# EAGLE board panel_2x1 (EAGLE 7.7.0)
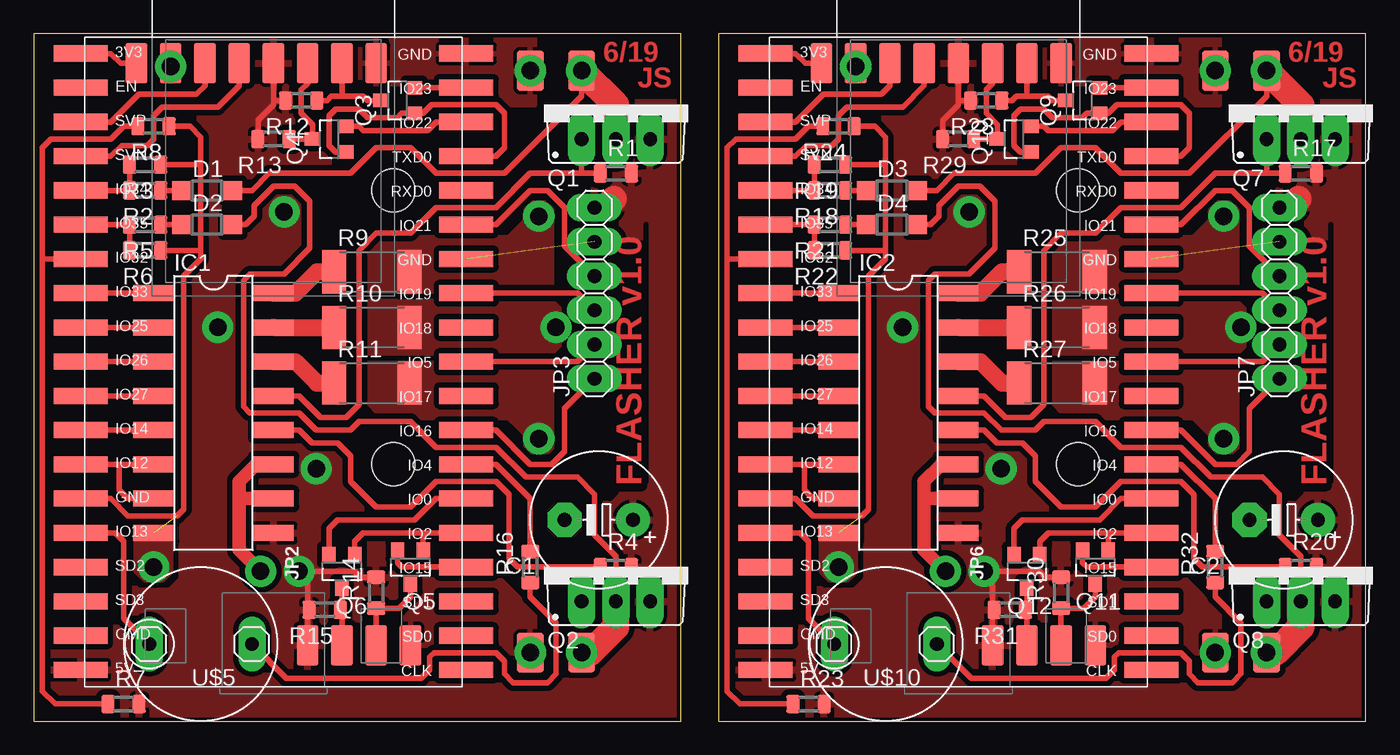
[diagram p0: board, top side]
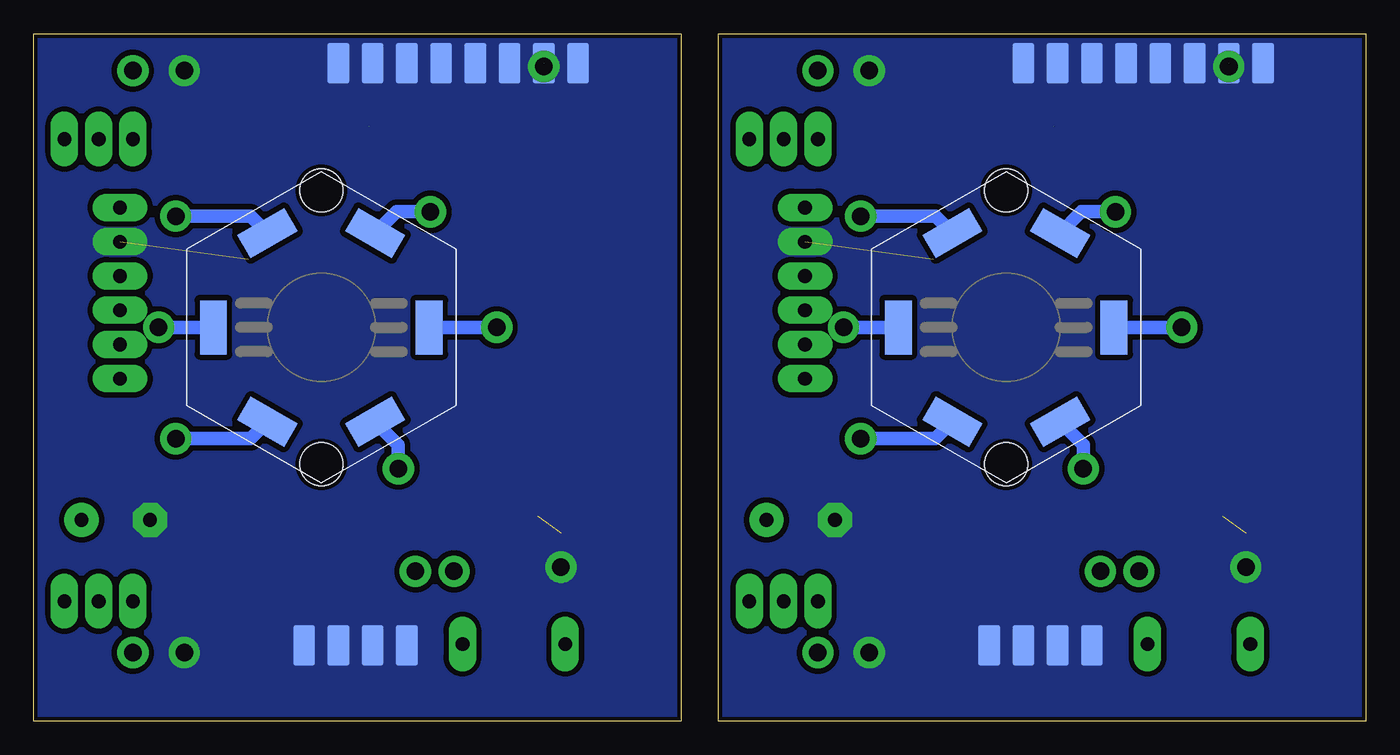
[diagram p1: board, bottom side, seen from below]

Size 98.8 x 51 mm. Coordinates in mm from the lower left corner, seen from the top.
Outline: 0,0 48,0 48,51 0,51 0,0
Outline: 50.8,0 98.8,0 98.8,51 50.8,51 50.8,0
Copper layers (1*16): Top 0.035mm / dielectric 1.5mm / Bottom 0.035mm
Design rules "homemade": minimum track width 0.4mm, minimum drill 0.8mm, track to track 0.4mm, track to pad 0.4mm, pad to pad 0.4mm, via to via 0.4mm, smd to smd 0mil, copper to edge 0.3mm, drill to drill 8mil, minimum pad ring 0.4mm, minimum via ring 0.3mm, stop-mask expansion 4mil, vias tented up to drill 0mil, thermal gap 10mil
Holes 3.2 mm at 26.67,39.37 26.67,19.05 77.47,39.37 77.47,19.05
tRestrict: area 23.8,16.2 to 29.6,21.9; area 23.8,36.5 to 29.6,42.3; area 74.6,16.2 to 80.4,21.9; area 74.6,36.5 to 80.4,42.3; 6 lines

## Footprints (pad centres in the part's own frame; a part is rotated, then mirrored left to right if it is on the bottom)
E5-10,5 = drill 1.016 pad 2.54: + -2.54,0 | drill 1.016 pad 2.54 octagon: - 2.54,0
SOD123 = smd 1.4 x 1.4: A 1.9,0; C -1.9,0
DIL16_BIG_SMD = smd 1.2 x 3: 1 -8.89,-4.445; 2 -6.35,-4.445; 3 -3.81,-4.445; 4 -1.27,-4.445; 5 1.27,-4.445; 6 3.81,-4.445; 7 6.35,-4.445; 8 8.89,-4.445; 9 8.89,4.445; 10 6.35,4.445; 11 3.81,4.445; 12 1.27,4.445; 13 -1.27,4.445; 14 -3.81,4.445; 15 -6.35,4.445; 16 -8.89,4.445
DEVKITC_BIG_SMD = smd 4 x 1.2: 1 -14.3,46.99; 2 -14.3,44.45; 3 -14.3,41.91; 4 -14.3,39.37; 5 -14.3,36.83; 6 -14.3,34.29; 7 -14.3,31.75; 8 -14.3,29.21; 9 -14.3,26.67; 10 -14.3,24.13; 11 -14.3,21.59; 12 -14.3,19.05; 13 -14.3,16.51; 14 -14.3,13.97; 15 -14.3,11.43; 16 -14.3,8.89; 17 -14.3,6.35; 18 -14.3,3.81; 19 -14.3,1.27; 20 14.3,1.27; 21 14.3,3.81; 22 14.3,6.35; 23 14.3,8.89; 24 14.3,11.43; 25 14.3,13.97; 26 14.3,16.51; 27 14.3,19.05; 28 14.3,21.59; 29 14.3,24.13; 30 14.3,26.67; 31 14.3,29.21; 32 14.3,31.75; 33 14.3,34.29; 34 14.3,36.83; 35 14.3,39.37; 36 14.3,41.91; 37 14.3,44.45; 38 14.3,46.99
PINH2X04SMD = smd 1.6 x 3 bottom: B1 -3.81,-2; B2 -1.27,-2; B3 1.27,-2; B4 3.81,-2 | smd 1.6 x 3: T1 -3.81,-2; T2 -1.27,-2; T3 1.27,-2; T4 3.81,-2
1X06 = drill 1.016 long: 1 -6.35,0; 2 -3.81,0; 3 -1.27,0; 4 1.27,0; 5 3.81,0; 6 6.35,0
HEX_HEATSINK = smd 4 x 2 rotated 330: B+ 4,7; R- -4,-7 | smd 4 x 2 rotated 210: B- -4,7; R+ 4,-7 | smd 2 x 4: G+ 8,0; G- -8,0
TO220BV = drill 1.016 long: D 0,-2.54; G -2.54,-2.54; S 2.54,-2.54
SOT23_DIST = smd 1 x 1.2: 1 -0.95,-1.227; 2 0.95,-1.227; 3 0,1.227
R0805S = smd 1 x 1.35: 1 -1.15,0; 2 1.15,0
R2512 = smd 1.8 x 3.2: 1 -2.8,0; 2 2.8,0
2X3MM = smd 2 x 3: 1 0,0
PIEZO = drill 1.016 long: + 1.27,8.89; - 1.27,1.27

## Placement (x,y rotation side)
C1  [E5-10,5]  41.91,14.92 180 top
C2  [E5-10,5]  92.71,14.92 180 top
D1  [SOD123]  12.86,39.37 0 top
D2  [SOD123]  12.86,36.83 0 top
D3  [SOD123]  63.66,39.37 0 top
D4  [SOD123]  63.66,36.83 0 top
IC1  ULN2004A_BIG_SMD  [DIL16_BIG_SMD]  13.34,22.86 270 top
IC2  ULN2004A_BIG_SMD  [DIL16_BIG_SMD]  64.14,22.86 270 top
IM1  DEVKITC_BIG_SMD  [DEVKITC_BIG_SMD]  17.78,2.54 0 top
IM2  DEVKITC_BIG_SMD  [DEVKITC_BIG_SMD]  68.58,2.54 0 top
JP1  [PINH2X04SMD]  21.59,50.8 0 top
JP2  [PINH2X04SMD]  24.13,7.62 0 top
JP3  [1X06]  41.59,31.75 90 top
JP4  [PINH2X04SMD]  11.43,50.8 0 top
JP5  [PINH2X04SMD]  72.39,50.8 0 top
JP6  [PINH2X04SMD]  74.93,7.62 0 top
JP7  [1X06]  92.39,31.75 90 top
JP8  [PINH2X04SMD]  62.23,50.8 0 top
LED1  [HEX_HEATSINK]  26.67,29.21 0 bottom
LED2  [HEX_HEATSINK]  77.47,29.21 0 bottom
Q1  IRF4905  [TO220BV]  43.18,45.72 0 top
Q2  IRF4905  [TO220BV]  43.18,11.43 0 top
Q3  [SOT23_DIST]  26.99,46.04 90 top
Q4  [SOT23_DIST]  21.91,43.18 90 top
Q5  [SOT23_DIST]  27.94,11.43 180 top
Q6  [SOT23_DIST]  22.86,11.11 180 top
Q7  IRF4905  [TO220BV]  93.98,45.72 0 top
Q8  IRF4905  [TO220BV]  93.98,11.43 0 top
Q9  [SOT23_DIST]  77.79,46.04 90 top
Q10  [SOT23_DIST]  72.71,43.18 90 top
Q11  [SOT23_DIST]  78.74,11.43 180 top
Q12  [SOT23_DIST]  73.66,11.11 180 top
R1  100k  [R0805S]  43.18,40.64 0 top
R2  18k  [R0805S]  8.26,39.37 180 top
R3  33k  [R0805S]  8.26,41.27 180 top
R4  100k  [R0805S]  43.18,11.43 0 top
R5  18k  [R0805S]  8.26,36.83 180 top
R6  33k  [R0805S]  8.26,34.92 180 top
R7  4k7  [R0805S]  6.67,1.27 0 top
R8  1k  [R0805S]  8.89,44.13 180 top
R9  10R  [R2512]  25.08,33.34 0 top
R10  10R  [R2512]  25.08,29.21 0 top
R11  10R  [R2512]  25.08,25.08 0 top
R12  18k  [R0805S]  19.84,46.04 180 top
R13  18k  [R0805S]  17.78,43.18 180 top
R14  18k  [R0805S]  25.4,9.53 90 top
R15  18k  [R0805S]  21.59,8.26 180 top
R16  18k  [R0805S]  36.83,11.43 90 top
R17  100k  [R0805S]  93.98,40.64 0 top
R18  18k  [R0805S]  59.05,39.37 180 top
R19  33k  [R0805S]  59.05,41.27 180 top
R20  100k  [R0805S]  93.98,11.43 0 top
R21  18k  [R0805S]  59.05,36.83 180 top
R22  33k  [R0805S]  59.05,34.92 180 top
R23  4k7  [R0805S]  57.47,1.27 0 top
R24  1k  [R0805S]  59.69,44.13 180 top
R25  10R  [R2512]  75.88,33.34 0 top
R26  10R  [R2512]  75.88,29.21 0 top
R27  10R  [R2512]  75.88,25.08 0 top
R28  18k  [R0805S]  70.64,46.04 180 top
R29  18k  [R0805S]  68.58,43.18 180 top
R30  18k  [R0805S]  76.2,9.53 90 top
R31  18k  [R0805S]  72.39,8.26 180 top
R32  18k  [R0805S]  87.63,11.43 90 top
U$1  PAD_1SIDE_SMALL  [2X3MM]  40.64,48.26 180 top
U$2  PAD_1SIDE_SMALL  [2X3MM]  36.83,48.26 180 top
U$3  PAD_1SIDE_SMALL  [2X3MM]  40.64,5.08 180 top
U$4  PAD_1SIDE_SMALL  [2X3MM]  36.83,5.08 180 top
U$5  PIEZO  [PIEZO]  17.46,4.45 90 top
U$6  PAD_1SIDE_SMALL  [2X3MM]  91.44,48.26 180 top
U$7  PAD_1SIDE_SMALL  [2X3MM]  87.63,48.26 180 top
U$8  PAD_1SIDE_SMALL  [2X3MM]  91.44,5.08 180 top
U$9  PAD_1SIDE_SMALL  [2X3MM]  87.63,5.08 180 top
U$10  PIEZO  [PIEZO]  68.26,4.45 90 top

## Library data of the parts
C1 C2 R1-R32 = rcl_upravena
D1-D4 = diode
IC1 IC2 = uln-udn_upravena
IM1 IM2 = esp32
JP1 JP2 JP4-JP6 JP8 = pinhead_smd
JP3 JP7 = pinhead
LED1 LED2 = RGB_LED
Q1 Q2 Q7 Q8 = transistor-power
Q3-Q6 Q9-Q12 = transistors
U$1-U$4 U$6-U$9 = wirepad_smd
U$5 U$10 = piezo

## Nets
!B: IC1.16 R9.1
!B1: IC2.16 R25.1
!G: IC1.15 R10.1
!G1: IC2.15 R26.1
!PWR1_EN: IC1.13 Q1.G R1.1
!PWR1_EN1: IC2.13 Q7.G R17.1
!PWR2_EN: IC1.12 Q2.G R4.1
!PWR2_EN1: IC2.12 Q8.G R20.1
!R: IC1.14 R11.1
!R1: IC2.14 R27.1
!W: IC1.10 IC1.11
!W1: IC2.10 IC2.11
+3V1: IM2.1 JP8.T1
+3V3: IM1.1 JP4.T1
+5V: C1.+ IC1.9 IM1.19 JP1.T1 JP2.T1 JP3.6 LED1.B+ LED1.G+ LED1.R+ Q1.S Q2.S R1.2 R4.2 R7.2 R12.2 R13.2 R14.2 R15.2
+5V1: C2.+ IC2.9 IM2.19 JP5.T1 JP6.T1 JP7.6 LED2.B+ LED2.G+ LED2.R+ Q7.S Q8.S R17.2 R20.2 R23.2 R28.2 R29.2 R30.2 R31.2
B: IC1.1 IM1.8
B1: IC2.1 IM2.8
BA: LED1.B- R9.2
BA1: LED2.B- R25.2
BUZZ-N: R16.1 U$5.-
BUZZ-N1: R32.1 U$10.-
BUZZ_N: IM1.26 R16.2
BUZZ_N1: IM2.26 R32.2
BUZZ_P: IM1.15 U$5.+
BUZZ_P1: IM2.15 U$10.+
EN: IM1.2
EN1: IM2.2
G: IC1.2 IM1.9
G1: IC2.2 IM2.9
GA: LED1.G- R10.2
GA1: LED2.G- R26.2
GND: C1.- IC1.8 IM1.14 IM1.32 IM1.38 JP1.B1 JP1.B2 JP1.B3 JP1.B4 JP1.T4 JP2.B1 JP2.B2 JP2.B3 JP2.B4 JP2.T4 JP3.5 JP4.B1 JP4.B2 JP4.B3 JP4.B4 JP4.T2 R3.1 R6.1 R8.1 U$2.1 U$4.1
GND1: C2.- IC2.8 IM2.14 IM2.32 IM2.38 JP5.B1 JP5.B2 JP5.B3 JP5.B4 JP5.T4 JP6.B1 JP6.B2 JP6.B3 JP6.B4 JP6.T4 JP7.5 JP8.B1 JP8.B2 JP8.B3 JP8.B4 JP8.T2 R19.1 R22.1 R24.1 U$7.1 U$9.1
IO0: IM1.25 Q6.2
IO0_1: JP6.T2 Q12.3 R31.1
IO0_5: JP2.T2 Q6.3 R15.1
IO1: IM2.16
IO1_EN: IM1.24 Q5.1 Q6.1
IO1_EN1: IM2.24 Q11.1 Q12.1
IO2: IM2.17
IO2_EN: IM1.35 Q3.1 Q4.1
IO2_EN1: IM2.35 Q9.1 Q10.1
IO3: IM1.34
IO4: IM2.18
IO5: IM1.29 JP3.2
IO6: IM1.20
IO7: IM1.21
IO8: IM1.22
IO9: IM1.16
IO10: IM1.17
IO11: IM1.18
IO12: IM2.20
IO13: IM2.21
IO14: IM2.22
IO15: IM1.23 Q5.2
IO15_1: JP6.T3 Q11.3 R30.1
IO15_5: JP2.T3 Q5.3 R14.1
IO16: IM1.27 JP3.1
IO17: IM1.28
IO18: IM1.30
IO19: IM1.31 JP3.3
IO20: IM2.37 Q9.2
IO21: IM1.33 JP3.4
IO22: IM1.36 Q4.2
IO22_1: JP5.T2 Q10.3 R29.1
IO22_5: JP1.T2 Q4.3 R13.1
IO23: IM1.37 Q3.2
IO23_1: JP5.T3 Q9.3 R28.1
IO23_5: JP1.T3 Q3.3 R12.1
IO24: IM2.36 Q10.2
IO25: IM2.25 Q12.2
IO26: IM2.23 Q11.2
IO27: IM2.33 JP7.4
IO28: IM2.31 JP7.3
IO29: IM2.30
IO30: IM2.28
IO31: IM2.29 JP7.2
IO32: IM2.27 JP7.1
IO33: IM2.3 JP8.T3
IO34: IM2.4 JP8.T4
IO35: IM2.34
IO36: IM1.3 JP4.T3
IO39: IM1.4 JP4.T4
PWR1: D1.A Q1.D U$1.1
PWR1+: D1.C R2.1
PWR1+1: D3.C R18.1
PWR1_EN: IC1.4 IM1.11
PWR1_EN1: IC2.4 IM2.11
PWR1_MEAS: IM1.5 R2.2 R3.2
PWR1_MEAS1: IM2.5 R18.2 R19.2
PWR2: D2.A Q2.D U$3.1
PWR2+: D2.C R5.1
PWR2+1: D4.C R21.1
PWR2_EN: IC1.5 IM1.12
PWR2_EN1: IC2.5 IM2.12
PWR2_MEAS: IM1.6 R5.2 R6.2
PWR2_MEAS1: IM2.6 R21.2 R22.2
PWR3: D3.A Q7.D U$6.1
PWR4: D4.A Q8.D U$8.1
PWR_MEAS: IM1.7 R7.1 R8.2
PWR_MEAS1: IM2.7 R23.1 R24.2
R: IC1.3 IM1.10
R1: IC2.3 IM2.10
RA: LED1.R- R11.2
RA1: LED2.R- R27.2
W: IC1.6 IC1.7 IM1.13
W1: IC2.6 IC2.7 IM2.13

## Tracks (layer width: path | path; a pad name or v marks a point on that pad's centre or on a via)
!B
  Top 1.27: IC1.16 19.43,31.75 21.01,33.34 R9.1
!B1
  Top 1.27: IC2.16 70.22,31.75 71.81,33.34 R25.1
!G
  Top 1.27: IC1.15 R10.1
!G1
  Top 1.27: IC2.15 R26.1
!PWR1_EN
  Top 0.406: 40.64,40.64 36.83,40.64 34.29,38.1 29.84,38.1 27.94,36.2 25.4,36.2 24.13,34.92 24.13,23.5 23.18,22.54 21.27,22.54 19.68,24.13 IC1.13 | Q1.G 40.64,40.64 | R1.1 40.64,40.64
!PWR1_EN1
  Top 0.406: 91.44,40.64 87.63,40.64 85.09,38.1 80.64,38.1 78.74,36.2 76.2,36.2 74.93,34.92 74.93,23.5 73.98,22.54 72.07,22.54 70.48,24.13 IC2.13 | Q7.G 91.44,40.64 | R17.1 91.44,40.64
!PWR2_EN
  Top 0.406: IC1.12 19.68,21.59 20.64,20.64 22.54,20.64 23.5,19.68 23.5,17.78 25.4,15.88 27.94,15.88 29.84,17.78 34.29,17.78 35.24,16.83 35.24,12.06 35.88,11.43 40.64,11.43 | 40.64,11.43 Q2.G | R4.1 40.64,11.43
!PWR2_EN1
  Top 0.406: IC2.12 70.48,21.59 71.44,20.64 73.34,20.64 74.3,19.68 74.3,17.78 76.2,15.88 78.74,15.88 80.64,17.78 85.09,17.78 86.04,16.83 86.04,12.06 86.68,11.43 91.44,11.43 | 91.44,11.43 Q8.G | R20.1 91.44,11.43
!R
  Top 1.27: IC1.14 19.43,26.67 21.01,25.08 R11.1
!R1
  Top 1.27: IC2.14 70.22,26.67 71.81,25.08 R27.1
!W  (via drill 1.3)
  Top 1.016: IC1.11 16.51,19.05 15.24,17.78 15.24,16.51 | 15.24,16.51 15.24,12.7 v16.83,11.11 | IC1.10 15.24,16.51
!W1  (via drill 1.3)
  Top 1.016: IC2.11 67.31,19.05 66.04,17.78 66.04,16.51 | 66.04,16.51 66.04,12.7 v67.63,11.11 | IC2.10 66.04,16.51
+3V1
  Top 0.406: IM2.1 56.52,49.53 57.24,48.8 JP8.T1
+3V3
  Top 0.406: IM1.1 5.71,49.53 6.45,48.8 JP4.T1
+5V  (via drill 1.3)
  Top 0.406: JP1.T1 17.78,46.04 | 17.78,46.04 17.78,45.72 16.63,44.57 R13.2 | R12.2 17.78,46.04 | R14.2 24.25,10.68 23.81,11.11 20.64,11.11 20.32,10.79 20.32,8.26 | 20.32,8.26 JP2.T1 | R15.2 20.32,8.26
  Top 1.93: JP3.6 42.39,38.1 43.02,38.73
  Bottom 1.016: LED1.R+ 20.95,20.5 v20.95,18.73 | LED1.G+ v13.65,29.21 | LED1.B+ 21.1,37.78 v18.57,37.78
  other vias: 19.68,11.11
  pour Top (rank 3): 0,50.8 0,0 48.1,0 48.1,50.8
+5V1  (via drill 1.3)
  Top 0.406: JP5.T1 68.58,46.04 | 68.58,46.04 68.58,45.72 67.43,44.57 R29.2 | R28.2 68.58,46.04 | R30.2 75.05,10.68 74.61,11.11 71.44,11.11 71.12,10.79 71.12,8.26 | 71.12,8.26 JP6.T1 | R31.2 71.12,8.26
  Top 1.93: JP7.6 93.19,38.1 93.82,38.73
  Bottom 1.016: LED2.R+ 71.75,20.5 v71.75,18.73 | LED2.G+ v64.45,29.21 | LED2.B+ 71.9,37.78 v69.37,37.78
  other vias: 70.48,11.11
  pour Top (rank 3): 50.8,50.8 50.8,0 98.9,0 98.9,50.8
B
  Top 0.406: IM1.8 IC1.1
B1
  Top 0.406: IM2.8 IC2.1
BA  (via drill 1.3)
  Bottom 1.016: LED1.B- 31.93,37.47 v37.47,37.47
  pour Top (rank 2, no thermals): 24.61,31.75 38.42,31.75 38.42,38.1 38.1,38.42 36.83,38.42 36.51,38.1 36.51,37.15 35.24,35.88 25.88,35.88 24.61,34.61
BA1  (via drill 1.3)
  Bottom 1.016: LED2.B- 82.72,37.47 v88.27,37.47
  pour Top (rank 2, no thermals): 75.41,31.75 89.22,31.75 89.22,38.1 88.9,38.42 87.63,38.42 87.31,38.1 87.31,37.15 86.04,35.88 76.68,35.88 75.41,34.61
BUZZ-N
  Top 0.406: U$5.- 18.73,3.17 28.73,3.17 29.37,3.81 29.37,4.76 29.69,5.08 34.29,5.08 34.92,4.45 34.92,3.49 35.56,2.86 38.1,2.86 38.73,3.49 38.73,7.3 36.83,9.21 R16.1
BUZZ-N1
  Top 0.406: U$10.- 69.53,3.17 79.53,3.17 80.17,3.81 80.17,4.76 80.49,5.08 85.09,5.08 85.72,4.45 85.72,3.49 86.36,2.86 88.9,2.86 89.53,3.49 89.53,7.3 87.63,9.21 R32.1
BUZZ_N
  Top 0.406: IM1.26 34.29,19.05 36.83,16.51 R16.2
BUZZ_N1
  Top 0.406: IM2.26 85.09,19.05 87.63,16.51 R32.2
BUZZ_P
  Top 0.406: IM1.15 6.03,13.97 6.67,13.34 6.67,7.62 U$5.+
BUZZ_P1
  Top 0.406: IM2.15 56.83,13.97 57.47,13.34 57.47,7.62 U$10.+
G
  Top 0.406: IM1.9 IC1.2
G1
  Top 0.406: IM2.9 IC2.2
GA  (via drill 1.3)
  Bottom 1.016: LED1.G- v38.73,29.21
  pour Top (no thermals): 24.61,31.11 38.42,31.11 39.69,29.84 39.69,28.57 38.42,27.3 24.61,27.3
GA1  (via drill 1.3)
  Bottom 1.016: LED2.G- v89.53,29.21
  pour Top (no thermals): 75.41,31.11 89.22,31.11 90.49,29.84 90.49,28.57 89.22,27.3 75.41,27.3
GND  (via drill 1.3)  (3 unrouted)
  Top 0.406: IM1.14 5.71,16.51 6.99,15.24 10.64,15.24 11.11,15.72 11.11,33.02 12.38,34.29 12.38,34.92 | R6.1 12.38,34.92 | 12.38,34.92 12.38,41.27 | 12.38,41.27 12.38,43.34 11.59,44.13 R8.1 | R3.1 12.38,41.27
  other vias: 8.89,11.43 36.83,5.08 36.83,48.26 10.16,48.58
  pour Top (no thermals): 7.62,14.29 10.16,14.29 10.16,11.11 9.53,10.48 8.26,10.48 7.62,11.11
  pour Bottom (rank 3, no thermals): 0,0 48.26,0 48.26,50.8 0,50.8
  pour Top: 24.13,50.8 37.15,50.8 37.15,45.72 29.21,45.72 27.62,47.31 24.13,47.31
  pour Top (rank 2): 27.62,10.48 34.61,10.48 37.15,7.94 37.15,4.13 27.62,4.13
GND1  (via drill 1.3)  (3 unrouted)
  Top 0.406: IM2.14 56.52,16.51 57.78,15.24 61.44,15.24 61.91,15.72 61.91,33.02 63.18,34.29 63.18,34.92 | R22.1 63.18,34.92 | 63.18,34.92 63.18,41.27 | 63.18,41.27 63.18,43.34 62.39,44.13 R24.1 | R19.1 63.18,41.27
  other vias: 59.69,11.43 87.63,5.08 87.63,48.26 60.96,48.58
  pour Top (no thermals): 58.42,14.29 60.96,14.29 60.96,11.11 60.33,10.48 59.05,10.48 58.42,11.11
  pour Bottom (rank 3, no thermals): 50.8,0 99.06,0 99.06,50.8 50.8,50.8
  pour Top: 74.93,50.8 87.95,50.8 87.95,45.72 80.01,45.72 78.42,47.31 74.93,47.31
  pour Top (rank 2): 78.42,10.48 85.41,10.48 87.95,7.94 87.95,4.13 78.42,4.13
IO0
  Top 0.406: IM1.25 29.84,16.51 28.26,14.92 22.54,14.92 21.91,14.29 Q6.2
IO0_1
  Top 0.406: Q12.3 73.66,8.26 | 73.66,8.26 JP6.T2 | R31.1 73.66,8.26
IO0_5
  Top 0.406: Q6.3 22.86,8.26 | 22.86,8.26 JP2.T2 | R15.1 22.86,8.26
IO1_EN
  Top 0.406: IM1.24 28.89,13.97 | 28.89,13.97 24.45,13.97 23.81,13.34 Q6.1 | Q5.1 28.89,13.97
IO1_EN1
  Top 0.406: IM2.24 79.69,13.97 | 79.69,13.97 75.25,13.97 74.61,13.34 Q12.1 | Q11.1 79.69,13.97
IO2_EN
  Top 0.406: Q4.1 22.38,42.23 21.91,42.7 21.91,44.93 22.38,45.4 24.13,45.4 24.77,44.77 26.99,44.77 27.3,45.09 Q3.1 28.89,45.09 29.53,45.72 34.29,45.72 34.92,45.09 34.92,42.55 34.29,41.91 IM1.35
IO2_EN1
  Top 0.406: Q10.1 73.18,42.23 72.71,42.7 72.71,44.93 73.18,45.4 74.93,45.4 75.56,44.77 77.79,44.77 78.11,45.09 Q9.1 79.69,45.09 80.33,45.72 85.09,45.72 85.72,45.09 85.72,42.55 85.09,41.91 IM2.35
IO5
  Top 0.406: IM1.29 40.32,26.67 JP3.2
IO15
  Top 0.406: IM1.23 27.3,11.43 26.99,11.75 Q5.2
IO15_1
  Top 0.406: JP6.T3 R30.1 77.91,8.38 78.74,9.21 Q11.3
IO15_5
  Top 0.406: JP2.T3 R14.1 27.11,8.38 27.94,9.21 Q5.3
IO16
  Top 0.406: IM1.27 34.29,21.59 36.83,19.05 38.42,19.05 39.37,20 39.37,23.18 JP3.1
IO19
  Top 0.406: IM1.31 40.32,31.75 JP3.3
IO20
  Top 0.406: Q9.2 IM2.37
IO21
  Top 0.406: IM1.33 34.29,36.83 36.83,39.37 38.1,39.37 39.37,38.1 39.37,35.24 JP3.4
IO22  (1 unrouted)
  Top 0.406: IM1.36 29.84,44.45 29.21,43.81 24.45,43.81 24.13,44.13 Q4.2
IO22_1
  Top 0.406: JP5.T2 71.12,47.31 70.64,46.83 70.64,45.09 71.48,44.25 Q10.3 R29.1
IO22_5
  Top 0.406: JP1.T2 20.32,47.31 19.84,46.83 19.84,45.09 20.68,44.25 Q4.3 R13.1
IO23
  Top 0.406: Q3.2 IM1.37
IO23_1
  Top 0.406: Q9.3 75.56,46.04 75.25,46.35 73.66,46.35 | 73.66,46.35 JP5.T3 | R28.1 72.55,46.04 72.87,46.35 73.66,46.35
IO23_5
  Top 0.406: Q3.3 24.77,46.04 24.45,46.35 22.86,46.35 | 22.86,46.35 JP1.T3 | R12.1 21.75,46.04 22.07,46.35 22.86,46.35
IO24  (1 unrouted)
  Top 0.406: IM2.36 80.64,44.45 80.01,43.81 75.25,43.81 74.93,44.13 Q10.2
IO25
  Top 0.406: IM2.25 80.64,16.51 79.06,14.92 73.34,14.92 72.71,14.29 Q12.2
IO26
  Top 0.406: IM2.23 78.11,11.43 77.79,11.75 Q11.2
IO27
  Top 0.406: IM2.33 85.09,36.83 87.63,39.37 88.9,39.37 90.17,38.1 90.17,35.24 JP7.4
IO28
  Top 0.406: IM2.31 91.12,31.75 JP7.3
IO31
  Top 0.406: IM2.29 91.12,26.67 JP7.2
IO32
  Top 0.406: IM2.27 85.09,21.59 87.63,19.05 89.22,19.05 90.17,20 90.17,23.18 JP7.1
IO33
  Top 0.406: IM2.3 56.52,44.45 58.58,46.51 62.87,46.51 63.5,47.15 JP8.T3
IO34
  Top 0.406: IM2.4 56.52,41.91 57.31,42.7 59.21,42.7 59.69,43.18 59.69,44.93 60.33,45.56 64.45,45.56 66.04,47.15 JP8.T4
IO36
  Top 0.406: IM1.3 5.71,44.45 7.78,46.51 12.06,46.51 12.7,47.15 JP4.T3
IO39
  Top 0.406: IM1.4 5.71,41.91 6.51,42.7 8.41,42.7 8.89,43.18 8.89,44.93 9.53,45.56 13.65,45.56 15.24,47.15 JP4.T4
PWR1  (via drill 1.3)
  Top 0.406: D1.A 16.19,39.37 17.46,40.64 23.5,40.64 25.4,42.55 27.94,42.55 29.84,40.64 34.92,40.64 40.64,46.35 U$1.1
  Top 2: Q1.D 43.18,45.72 U$1.1
  other vias: 40.64,48.26
PWR1+
  Top 0.406: R2.1 D1.C
PWR1+1
  Top 0.406: R18.1 D3.C
PWR1_EN
  Top 0.406: IM1.11 IC1.4
PWR1_EN1
  Top 0.406: IM2.11 IC2.4
PWR1_MEAS
  Top 0.406: IM1.5 R2.2 R3.2
PWR1_MEAS1
  Top 0.406: IM2.5 R18.2 R19.2
PWR2  (via drill 1.3)
  Top 0.406: D2.A 15.72,36.83 16.35,37.47 16.35,38.26 17.78,39.69 19.37,39.69 20.48,38.58 20.48,35.08 18.57,33.18 16.03,33.18 15.56,32.7 15.56,23.34 16.03,22.86 19.68,22.86 20.95,21.59 23.5,21.59 24.13,22.23 27.94,22.23 29.84,20.32 34.29,20.32 36.51,18.1 40.32,18.1 41.59,16.83 41.59,13.81 43.18,12.22 Q2.D
  Top 2: U$3.1 41.27,5.08 43.18,6.99 Q2.D
  other vias: 40.64,5.08
PWR2+
  Top 0.406: R5.1 D2.C
PWR2+1
  Top 0.406: R21.1 D4.C
PWR2_EN
  Top 0.406: IM1.12 IC1.5
PWR2_EN1
  Top 0.406: IM2.12 IC2.5
PWR2_MEAS
  Top 0.406: IM1.6 R5.2 R6.2
PWR2_MEAS1
  Top 0.406: IM2.6 R21.2 R22.2
PWR3  (via drill 1.3)
  Top 0.406: D3.A 66.99,39.37 68.26,40.64 74.3,40.64 76.2,42.55 78.74,42.55 80.64,40.64 85.72,40.64 91.44,46.35 U$6.1
  Top 2: Q7.D 93.98,45.72 U$6.1
  other vias: 91.44,48.26
PWR4  (via drill 1.3)
  Top 0.406: D4.A 66.52,36.83 67.15,37.47 67.15,38.26 68.58,39.69 70.17,39.69 71.28,38.58 71.28,35.08 69.37,33.18 66.83,33.18 66.36,32.7 66.36,23.34 66.83,22.86 70.48,22.86 71.75,21.59 74.3,21.59 74.93,22.23 78.74,22.23 80.64,20.32 85.09,20.32 87.31,18.1 91.12,18.1 92.39,16.83 92.39,13.81 93.98,12.22 Q8.D
  Top 2: U$8.1 92.08,5.08 93.98,6.99 Q8.D
  other vias: 91.44,5.08
PWR_MEAS
  Top 0.406: R7.1 1.59,1.27 0.64,2.22 0.64,34.29 | 0.64,34.29 0.64,42.55 1.27,43.18 5.71,43.18 6.67,44.13 R8.2 | IM1.7 0.64,34.29
PWR_MEAS1
  Top 0.406: R23.1 52.39,1.27 51.44,2.22 51.44,34.29 | 51.44,34.29 51.44,42.55 52.07,43.18 56.52,43.18 57.47,44.13 R24.2 | IM2.7 51.44,34.29
R
  Top 0.406: IM1.10 IC1.3
R1
  Top 0.406: IM2.10 IC2.3
RA  (via drill 1.3)
  Bottom 1.016: LED1.R- 31.93,20.95 v37.47,20.95
  pour Top (rank 2, no thermals): 24.61,26.67 38.42,26.67 38.42,20.32 38.1,20 36.83,20 36.51,20.32 36.51,21.27 35.24,22.54 25.88,22.54 24.61,23.81
RA1  (via drill 1.3)
  Bottom 1.016: LED2.R- 82.72,20.95 v88.27,20.95
  pour Top (rank 2, no thermals): 75.41,26.67 89.22,26.67 89.22,20.32 88.9,20 87.63,20 87.31,20.32 87.31,21.27 86.04,22.54 76.68,22.54 75.41,23.81
W
  Top 0.406: IM1.13 6.35,19.05 | 6.35,19.05 IC1.6 | IC1.7 6.99,16.51 6.35,17.14 6.35,19.05
W1
  Top 0.406: IM2.13 57.15,19.05 | 57.15,19.05 IC2.6 | IC2.7 57.78,16.51 57.15,17.14 57.15,19.05

## Text on the board
Top: 6/19 | 6/19 | JS | JS | FLASHER v1.0 | FLASHER v1.0